# EAGLE board version3b (EAGLE 9.6.2)
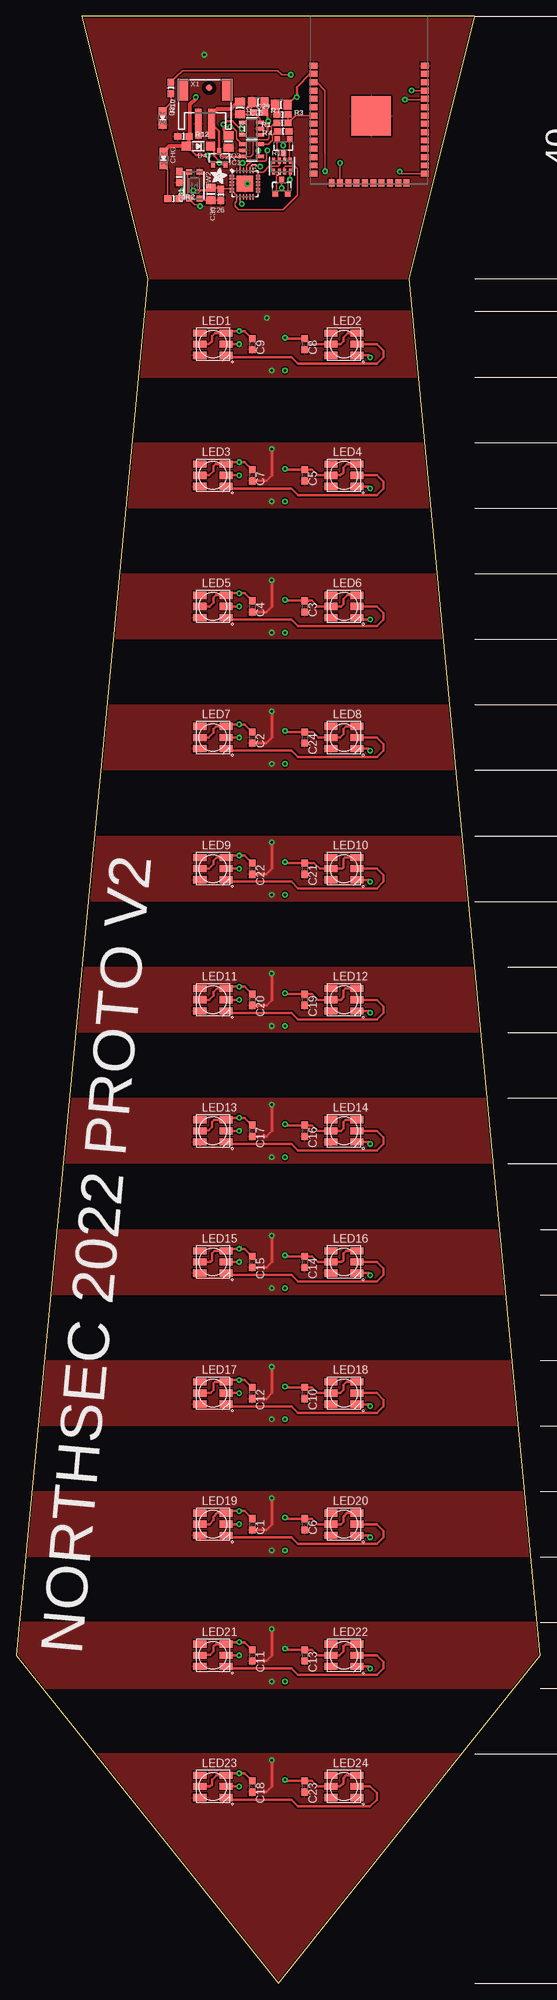
[diagram p0: board, top side]
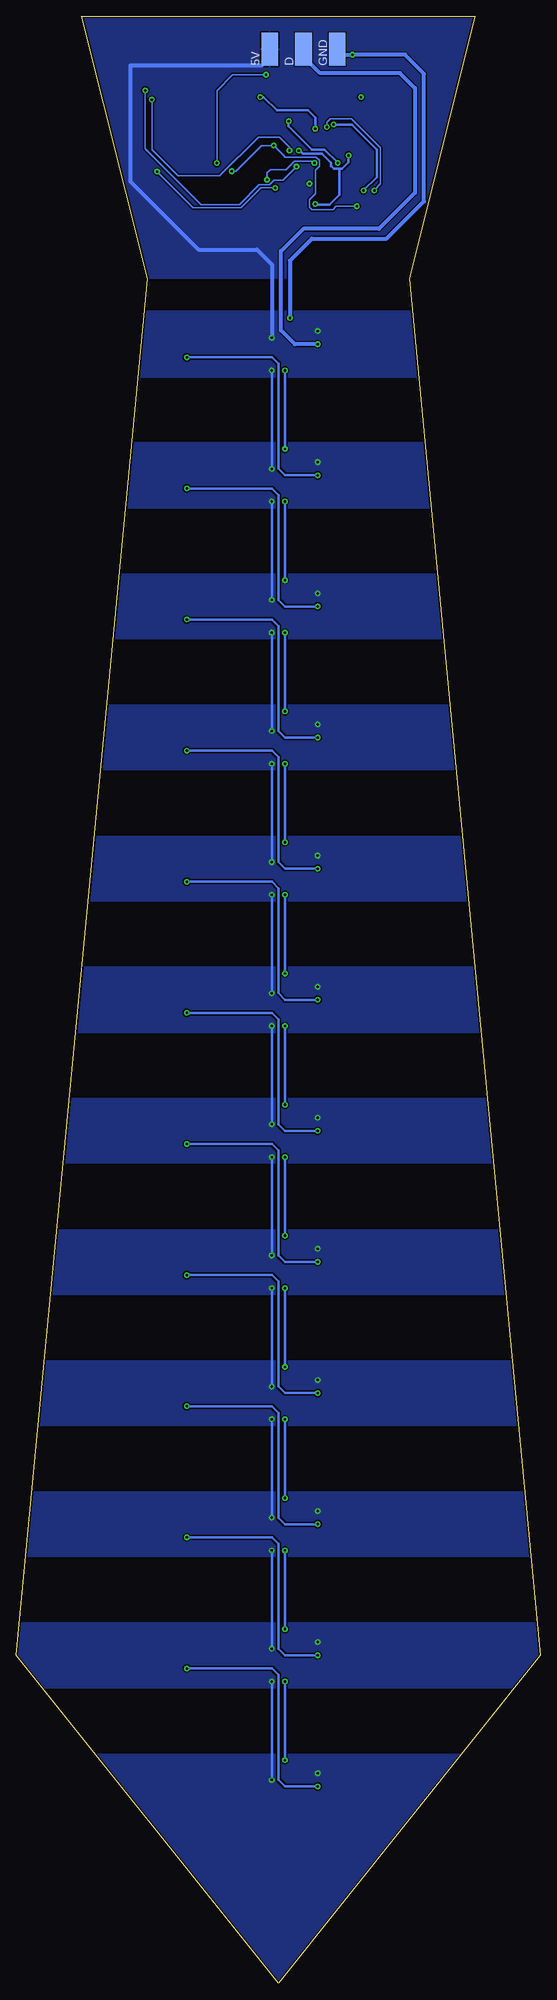
[diagram p1: board, bottom side, seen from below]

Size 80 x 300 mm. Coordinates in mm from the lower left corner, seen from the top.
Outline: 20,260 0,50 40,0 80,50 60,260 70,300 10,300 20,260
Copper layers (1*16): Top 0.035mm / dielectric 1.5mm / Bottom 0.035mm
Design rules "SparkFun *": minimum track width 8mil, minimum drill 0.35mm, track to track 8mil, track to pad 8mil, pad to pad 8mil, via to via 8mil, smd to smd 8mil, copper to edge 10mil, drill to drill 8mil, minimum pad ring 12mil, minimum via ring 10mil, stop-mask expansion 4mil, vias tented up to drill 25mil, thermal gap 10mil

## Footprints (pad centres in the part's own frame; a part is rotated, then mirrored left to right if it is on the bottom)
SMD2,54-5,08 = smd 2.54 x 5.08: 1 0,0
C0603 = smd 1.1 x 1: 1 -0.85,0; 2 0.85,0
0805-NO = smd 1.24 x 1.5: 1 -0.95,0; 2 0.95,0
0603-NO = smd 1.075 x 1: 1 -0.85,0; 2 0.85,0
CHIPLED_0805_NOOUTLINE = smd 1.2 x 1.2: A 0,-1.05; C 0,1.05
SOD-123 = smd 1.4 x 1.4: A 1.85,0; C -1.85,0
QFN24_4MM_SMSC = smd 0.8 x 0.28: 1 -2,1.25; 2 -2,0.75; 3 -2,0.25; 4 -2,-0.25; 5 -2,-0.75; 6 -2,-1.25; 13 2,-1.25; 14 2,-0.75; 15 2,-0.25; 16 2,0.25; 17 2,0.75; 18 2,1.25 | smd 0.28 x 0.8: 7 -1.25,-2; 8 -0.75,-2; 9 -0.25,-2; 10 0.25,-2; 11 0.75,-2; 12 1.25,-2; 19 1.25,2; 20 0.75,2; 21 0.25,2; 22 -0.25,2; 23 -0.75,2; 24 -1.25,2 | smd 2.5 x 2.5: THERM 0,0
WS28115050 = smd 2 x 1.1: DI 2,0; DO 2,-1.7; LEDVDD -2,0; NC -2,1.7; VDD 2,1.7; VSS -2,-1.7
SOT23-3 = smd 0.8 x 0.9: 1 -0.95,-1; 2 0.95,-1; 3 0,1.1
SOT23-R = smd 0.635 x 1.016: 1 -0.95,-1; 2 0.95,-1; 3 0,1
RESPACK_4X0603 = smd 0.45 x 0.9: 1 -1.3,-0.85; 2 -0.4,-0.85; 3 0.4,-0.85; 4 1.3,-0.85; 5 1.3,0.85; 6 0.4,0.85; 7 -0.4,0.85; 8 -1.3,0.85
BTN_KMR2_4.6X2.8 = smd 0.9 x 0.9: A 2.05,0.8; A' -2.05,0.8; B 2.05,-0.8; B' -2.05,-0.8
SOT23-5 = smd 0.55 x 1.2: 1 -0.95,-1.3; 2 0,-1.3; 3 0.95,-1.3; 4 0.95,1.3; 5 -0.95,1.3
FIDUCIAL_1MM = smd 1 x 1: 1 0,0
JSTPH2 = smd 1 x 4.6: 1 -1,-3.7; 2 1,-3.7 | smd 1.6 x 3.4: NC1 -3.4,1.5; NC2 3.4,1.5
WROOM32_SKINNY = smd 1.2 x 0.9: 1 -8.5,5; 2 -8.5,3.73; 3 -8.5,2.46; 4 -8.5,1.19; 5 -8.5,-0.08; 6 -8.5,-1.35; 7 -8.5,-2.62; 8 -8.5,-3.89; 9 -8.5,-5.16; 10 -8.5,-6.43; 11 -8.5,-7.7; 12 -8.5,-8.97; 13 -8.5,-10.24; 14 -8.5,-11.51; 25 8.5,-11.51; 26 8.5,-10.24; 27 8.5,-8.97; 28 8.5,-7.7; 29 8.5,-6.43; 30 8.5,-5.16; 31 8.5,-3.89; 32 8.5,-2.62; 33 8.5,-1.35; 34 8.5,-0.08; 35 8.5,1.19; 36 8.5,2.46; 37 8.5,3.73; 38 8.5,5 | smd 0.9 x 1.2: 15 -5.7,-12.9; 16 -4.43,-12.9; 17 -3.16,-12.9; 18 -1.89,-12.9; 19 -0.62,-12.9; 20 0.65,-12.9; 21 1.92,-12.9; 22 3.19,-12.9; 23 4.46,-12.9; 24 5.73,-12.9 | smd 6 x 6: P$1 0.34,-2.7

## Placement (x,y rotation side)
5V  [SMD2,54-5,08]  41.35,295 0 bottom
C1  [C0603]  36,70 270 top
C2  [C0603]  36,190 270 top
C3  [C0603]  44,210 270 top
C4  [C0603]  36,210 270 top
C5  [C0603]  44,230 270 top
C6  [C0603]  44,70 270 top
C7  [C0603]  36,230 270 top
C8  [C0603]  44,250 270 top
C9  [C0603]  36,250 270 top
C10  [C0603]  44,90 270 top
C11  [C0603]  36,50 270 top
C12  [C0603]  36,90 270 top
C13  [C0603]  44,50 270 top
C14  [C0603]  44,110 270 top
C15  [C0603]  36,110 270 top
C16  [C0603]  44,130 270 top
C17  [C0603]  36,130 270 top
C18  [C0603]  36,30 270 top
C19  [C0603]  44,150 270 top
C20  [C0603]  36,150 270 top
C21  [C0603]  44,170 270 top
C22  [C0603]  36,170 270 top
C23  [C0603]  44,30 270 top
C24  [C0603]  44,190 270 top
C25  10µF  [0805-NO]  36.92,286.88 180 top
C26  1uF  [0603-NO]  31.19,272.77 270 top
C27  10µF  [0805-NO]  32.37,280.89 270 top
C28  10µF  [0805-NO]  34.13,286.03 270 top
C29  10uF  [0805-NO]  40.42,286.54 180 top
C30  10uF  [0805-NO]  29.68,272.9 270 top
C31  1uF  [0603-NO]  24.86,275.49 270 top
CHG  ORANGE  [CHIPLED_0805_NOOUTLINE]  22.48,278.31 180 top
D  [SMD2,54-5,08]  36.19,295 0 bottom
D3  RED  [CHIPLED_0805_NOOUTLINE]  22.3,284.49 180 top
D4  MBR120  [SOD-123]  27.78,280.19 180 top
GND  [SMD2,54-5,08]  31.03,295 0 bottom
IC1  CP2104  [QFN24_4MM_SMSC]  34.89,274.48 0 top
LED1  WS28115050  [WS28115050]  30,250 0 top
LED2  WS28115050  [WS28115050]  50,250 0 top
LED3  WS28115050  [WS28115050]  30,230 0 top
LED4  WS28115050  [WS28115050]  50,230 0 top
LED5  WS28115050  [WS28115050]  30,210 0 top
LED6  WS28115050  [WS28115050]  50,210 0 top
LED7  WS28115050  [WS28115050]  30,190 0 top
LED8  WS28115050  [WS28115050]  50,190 0 top
LED9  WS28115050  [WS28115050]  30,170 0 top
LED10  WS28115050  [WS28115050]  50,170 0 top
LED11  WS28115050  [WS28115050]  30,150 0 top
LED12  WS28115050  [WS28115050]  50,150 0 top
LED13  WS28115050  [WS28115050]  30,130 0 top
LED14  WS28115050  [WS28115050]  50,130 0 top
LED15  WS28115050  [WS28115050]  30,110 0 top
LED16  WS28115050  [WS28115050]  50,110 0 top
LED17  WS28115050  [WS28115050]  30,90 0 top
LED18  WS28115050  [WS28115050]  50,90 0 top
LED19  WS28115050  [WS28115050]  30,70 0 top
LED20  WS28115050  [WS28115050]  50,70 0 top
LED21  WS28115050  [WS28115050]  30,50 0 top
LED22  WS28115050  [WS28115050]  50,50 0 top
LED23  WS28115050  [WS28115050]  30,30 0 top
LED24  WS28115050  [WS28115050]  50,30 0 top
Q1  mmbt2222  [SOT23-3]  40.76,280.26 180 top
Q2  mmbt2222  [SOT23-3]  40.48,273.97 0 top
Q3  DMG3415U  [SOT23-R]  30.95,278.41 0 top
R1  100K  [0603-NO]  40.61,283.75 180 top
R2  1K  [0603-NO]  23.97,272.19 0 top
R3  100K  [0603-NO]  40.61,285.02 0 top
R4  4.7K  [0603-NO]  40.73,282.48 180 top
R7  100K  [0603-NO]  37.05,285.34 0 top
R10  1K  [0603-NO]  23.59,289.08 270 top
R12  100K  [0603-NO]  25.49,281.72 0 top
R13  10K  [RESPACK_4X0603]  40.54,277.14 0 top
SW2  KMR2  [BTN_KMR2_4.6X2.8]  27.14,274.22 270 top
U2  AP2112-3.3  [SOT23-5]  35.91,282.86 90 top
U3  MCP73831T-2ACI/OT  [SOT23-5]  35.91,279.56 270 top
U$14  [ADAFRUIT_2.5MM]  29.73,274.45 0 top
U$34  FIDUCIAL_1MM  [FIDUCIAL_1MM]  29.43,289.08 270 top
X1  JSTPH  [JSTPH2]  28.8,287.3 0 top
X2  ESP32_WROOM32_SKINNY  [WROOM32_SKINNY]  53.82,287.5 0 top

## Library data of the parts
5V D GND = wirepad
C1-C24 = rcl
C25 C26 C28-C31 CHG D3 D4 IC1 LED1-LED24 Q3 R1-R4 R7 R10 R12 R13 SW2 U2 U3 U$14 X1 X2 = microbuilder
C27 = microbuilder; COMPANY: ADAFRUIT INDUSTRIES; DRAWN: KTOWN; REV: A
Q1 Q2 = SparkFun
U$34 = microbuilder; BOM: EXCLUDE

## Nets
3.3V: C26.1 C27.1 C29.1 C30.1 IC1.5 IC1.6 IC1.7 R13.3 U2.5 X2.2
A0_DAC2: X2.11
A1_DAC1: X2.10
A2_I34: X2.6
A3_I39: X2.5
A4_IO36: X2.4
A5_IO4: X2.26
A13_I35: R1.1 R3.2 X2.7
DTR: IC1.23 Q2.2 R13.4
EN: R7.1 U2.3
GND: C1.2 C2.2 C3.2 C4.2 C5.2 C6.2 C7.2 C8.2 C9.2 C10.2 C11.2 C12.2 C13.2 C14.2 C15.2 C16.2 C17.2 C18.2 C19.2 C20.2 C21.2 C22.2 C23.2 C24.2 C25.2 C26.2 C27.2 C28.2 C29.2 C30.2 C31.2 D3.C GND.1 IC1.2 IC1.THERM LED1.VSS LED2.VSS LED3.VSS LED4.VSS LED5.VSS LED6.VSS LED7.VSS LED8.VSS LED9.VSS LED10.VSS LED11.VSS LED12.VSS LED13.VSS LED14.VSS LED15.VSS LED16.VSS LED17.VSS LED18.VSS LED19.VSS LED20.VSS LED21.VSS LED22.VSS LED23.VSS LED24.VSS R3.1 R4.1 R12.1 SW2.A SW2.A' U2.2 U3.2 X1.1 X2.1 X2.15 X2.38 X2.P$1
GPIO0: Q2.3 X2.25
GPIO2: X2.24
IO12_A11: X2.14
IO13_A12: R10.1 X2.16
IO14_A6: X2.13
IO15_A8: X2.23
IO16: X2.27
IO17: X2.28
IO21: X2.33
IO27_A10: X2.12
IO32_A7: X2.8
IO33_A9: X2.9
MISO: X2.31
MOSI: X2.30
N$1: LED1.DO LED2.DI
N$2: LED2.DO LED3.DI
N$3: LED3.DO LED4.DI
N$4: LED4.DO LED5.DI
N$5: LED5.DO LED6.DI
N$6: LED6.DO LED7.DI
N$7: LED7.DO LED8.DI
N$8: LED8.DO LED9.DI
N$9: LED9.DO LED10.DI
N$10: LED10.DO LED11.DI
N$11: LED11.DO LED12.DI
N$12: LED12.DO LED13.DI
N$13: LED13.DO LED14.DI
N$14: LED14.DO LED15.DI
N$15: LED15.DO LED16.DI
N$16: LED16.DO LED17.DI
N$17: LED17.DO LED18.DI
N$18: LED18.DO LED19.DI
N$19: LED19.DO LED20.DI
N$20: LED20.DO LED21.DI
N$21: LED21.DO LED22.DI
N$22: LED22.DO LED23.DI
N$23: LED23.DO LED24.DI
N$24: CHG.C R2.1
N$25: R2.2 U3.1
N$26: D.1 LED1.DI
N$27: R4.2 U3.5
N$28: IC1.3
N$29: IC1.4
N$30: Q1.1 R13.5
N$31: Q2.1 R13.2
N$32: C25.1 D4.C Q3.2 R7.2 U2.1
N$33: D3.A R10.2
RESET: C31.1 Q1.3 R13.6 SW2.B SW2.B' X2.3
RTS: IC1.19 Q1.2 R13.7
RXD0: IC1.21 X2.34
SCK: X2.29
SCL: X2.36
SDA: X2.37
TXD0: IC1.20 X2.35
VBAT: C28.1 Q3.3 R1.2 U3.3 X1.2
VBUS: CHG.A D4.A IC1.8 Q3.1 R12.2 U3.4
VDD: 5V.1 C1.1 C2.1 C3.1 C4.1 C5.1 C6.1 C7.1 C8.1 C9.1 C10.1 C11.1 C12.1 C13.1 C14.1 C15.1 C16.1 C17.1 C18.1 C19.1 C20.1 C21.1 C22.1 C23.1 C24.1 LED1.LEDVDD LED1.VDD LED2.LEDVDD LED2.VDD LED3.LEDVDD LED3.VDD LED4.LEDVDD LED4.VDD LED5.LEDVDD LED5.VDD LED6.LEDVDD LED6.VDD LED7.LEDVDD LED7.VDD LED8.LEDVDD LED8.VDD LED9.LEDVDD LED9.VDD LED10.LEDVDD LED10.VDD LED11.LEDVDD LED11.VDD LED12.LEDVDD LED12.VDD LED13.LEDVDD LED13.VDD LED14.LEDVDD LED14.VDD LED15.LEDVDD LED15.VDD LED16.LEDVDD LED16.VDD LED17.LEDVDD LED17.VDD LED18.LEDVDD LED18.VDD LED19.LEDVDD LED19.VDD LED20.LEDVDD LED20.VDD LED21.LEDVDD LED21.VDD LED22.LEDVDD LED22.VDD LED23.LEDVDD LED23.VDD LED24.LEDVDD LED24.VDD

## Tracks (layer width: path | path; a pad name or v marks a point on that pad's centre or on a via)
3.3V  (via drill 0.35)
  Top 0.254: C26.1 30.8,273.62 | 31.26,273.73 IC1.5 IC1.6 33.09,273.23 33.64,272.68 IC1.7 33.64,271.83 33.37,271.56 33.37,271.05 33.93,270.49 40.72,270.49 42.92,272.69 42.92,276.76 42.54,277.14 41.11,277.14 40.86,276.89 40.86,276.38 R13.3 40.99,276.34
  Top 0.406: U2.5 34.38,282.13 v34.38,282.86 34.13,282.86 32.99,284 32.1,284 v31.59,283.49 31.59,282.73 32.37,281.95 C27.1 | 30.91,273.9 C26.1 | 31.26,273.73 31.26,273.69 C26.1 | v27.02,273.46 29.29,273.46 C30.1 30.96,273.85 C26.1 | 41.61,286.78 C29.1 42.51,287.68 v42.79,287.68 42.79,289.2 44.82,291.23 X2.2
  Bottom 0.406: v27.02,273.46 24.98,275.49 24.98,279.68 28.8,283.49 v31.59,283.49 | v34.38,282.86 34.38,284.51 35.53,285.65 40.23,285.65 42.25,287.68 v42.79,287.68
A5_IO4
  Top 0.254: X2.26 62.89,277.26
A13_I35
  Top 0.203: R1.1 42.59,284.88 X2.7
  Top 0.254: R1.1 R3.2 41.75,285.02
DTR  (via drill 0.35)
  Top 0.254: R13.4 41.75,276.2 v41.75,275.09 41.43,274.77 Q2.2 | IC1.23 34.14,277.28 v34.51,277.65
  Bottom 0.254: v34.51,277.65 34.76,277.91 37.56,277.91 38.83,276.64 41.24,276.64 41.75,276.13 v41.75,275.09
EN
  Top 0.254: 36.92,285.91 36.45,285.44 36.24,285.44 R7.1 37.21,284.39 U2.3
GND  (via drill 0.35)
  Top 0.254: IC1.2 34.89,275.23 34.89,274.73 35.02,274.73 v35.27,274.48 | C26.2 28.19,271.93 SW2.A | C28.2 35.21,285.08 | 35.25,285.14 35.25,286.19 35.94,286.88 C25.2 | C31.2 24.86,274.48 | C29.2 39.76,286.25 R3.1
  Top 0.406: C2.2 38.15,189.15 39,190 v39,194 | C4.2 38.15,209.15 39,210 v39,214 | C7.2 38.15,229.15 39,230 v39,234 | C22.2 38.15,169.15 39,170 v39,174 | C17.2 38.15,129.15 39,130 v39,134 | C15.2 38.15,109.15 39,110 v39,114 | C12.2 38.15,89.15 39,90 v39,94 | C1.2 38.15,69.15 39,70 v39,74 | C11.2 38.15,49.15 39,50 v39,54 | C18.2 38.15,29.15 39,30 v39,34 | C20.2 38.15,149.15 39,150 v39,154
  Bottom 0.406: v39,234 v39,246 | v39,214 v39,226 | v39,194 v39,206 | v39,174 v39,186 | v39,134 v39,146 | v39,114 v39,126 | v39,94 v39,106 | v39,74 v39,86 | v39,54 v39,66 | v39,34 v39,46 | v39,154 v39,166
  Bottom 0.61: v38.24,254 38.24,262.77 34.92,266.09 23.49,266.09 17.77,271.81 17.77,291.24 20.7,294.16 v28.7,294.16 30.19,294.16 GND.1
  pour Top (isolate 0.1): 10,300 10,260 70,260 70,300
  pour Top (isolate 0.1): 10,255 10,245 70,245 70,255
  pour Top (isolate 0.1): 10,235 70,235 70,225 10,225
  pour Top (isolate 0.1): 10,215 70,215 70,205 10,205
  pour Top (isolate 0.1): 10,195 70,195 70,185 10,185
  pour Top (isolate 0.1): 10,175 70,175 70,165 10,165
  pour Top (isolate 0.1): 5,155 75,155 75,145 5,145
  pour Top (isolate 0.1): 0,115 80,115 80,105 0,105
  pour Top (isolate 0.1): 5,135 75,135 75,125 5,125
  pour Top (isolate 0.1): 0,95 80,95 80,85 0,85
  pour Top (isolate 0.1): 0,75 80,75 80,65 0,65
  pour Top (isolate 0.1): 0,45 80,45 80,55 0,55
  pour Top (isolate 0.1): 10,35 10,0 70,0 70,35
GPIO0  (via drill 0.35)
  Top 0.254: v58.52,276.32 58.84,276 60.55,276 60.57,275.99 X2.25 | Q2.3 v40.48,273.84
  Bottom 0.254: v40.48,273.84 42.66,273.84 45.72,270.79 52.99,270.79 v58.52,276.32
IO13_A12  (via drill 0.35)
  Top 0.254: 49.39,274.78 X2.16 v49.39,277.64 v49.4,277.65 | R10.1 23.59,289.96 24.46,290.83 24.48,290.83 25.39,291.75 39.87,291.75 40.51,291.11 v41.91,291.11
  Bottom 0.254: v41.91,291.11 46.98,291.11 49.4,288.7 v49.4,277.65
IO15_A8
  Top 0.254: 58.4,274.49 X2.23
MOSI
  Top 0.254: X2.30 62.89,282.34
N$1
  Top 0.406: LED1.DO 32.3,248 42,248 43,247 55,247 56,248 56,249 55,250 LED2.DI
N$2  (via drill 0.35)
  Top 0.406: LED2.DO 53.7,248.3 v54,248 | v34,230 LED3.DI
  Bottom 0.406: v54,248 41,248 40,247 40,231 39,230 v34,230
N$3
  Top 0.406: LED3.DO 32.3,228 42,228 43,227 55,227 56,228 56,229 55,230 LED4.DI
N$4  (via drill 0.35)
  Top 0.406: LED4.DO 53.7,228.3 v54,228 | LED5.DI v34,210
  Bottom 0.406: v54,228 41,228 40,227 40,211 39,210 v34,210
N$5
  Top 0.406: LED5.DO 32.3,208 42,208 43,207 55,207 56,208 56,209 55,210 LED6.DI
N$6  (via drill 0.35)
  Top 0.406: LED6.DO 52.3,208 v54,208 | v34,190 LED7.DI
  Bottom 0.406: v54,208 41,208 40,207 40,191 39,190 v34,190
N$7
  Top 0.406: LED7.DO 32.7,188.3 33,188 42,188 43,187 55,187 56,188 56,189 55,190 LED8.DI
N$8  (via drill 0.35)
  Top 0.406: LED8.DO 53.7,188.3 v54,188 | v34,170 LED9.DI
  Bottom 0.406: v54,188 41,188 40,187 40,171 39,170 v34,170
N$9
  Top 0.406: LED9.DO 32.7,168.3 33,168 42,168 43,167 55,167 56,168 56,169 55,170 LED10.DI
N$10  (via drill 0.35)
  Top 0.406: LED10.DO 53.7,168.3 v54,168 | v34,150 LED11.DI
  Bottom 0.406: v54,168 41,168 40,167 40,151 39,150 v34,150
N$11
  Top 0.406: LED11.DO 32.7,148.3 33,148 42,148 43,147 55,147 56,148 56,149 55,150 LED12.DI
N$12  (via drill 0.35)
  Top 0.406: LED12.DO 53.7,148.3 v54,148 | v34,130 LED13.DI
  Bottom 0.406: v54,148 41,148 40,147 40,131 39,130 v34,130
N$13
  Top 0.406: LED13.DO 32.7,128.3 33,128 42,128 43,127 55,127 56,128 56,129 55,130 LED14.DI
N$14  (via drill 0.35)
  Top 0.406: LED14.DO 53.7,128.3 v54,128 | v34,110 LED15.DI
  Bottom 0.406: v54,128 41,128 40,127 40,111 39,110 v34,110
N$15
  Top 0.406: LED15.DO 32.7,108.3 33,108 42,108 43,107 55,107 56,108 56,109 55,110 LED16.DI
N$16  (via drill 0.35)
  Top 0.406: LED16.DO 53.7,108.3 v54,108 | v34,90 LED17.DI
  Bottom 0.406: v54,108 41,108 40,107 40,91 39,90 v34,90
N$17
  Top 0.406: LED17.DO 32.7,88.3 33,88 42,88 43,87 55,87 56,88 56,89 55,90 LED18.DI
N$18  (via drill 0.35)
  Top 0.406: LED18.DO 53.7,88.3 v54,88 | v34,70 LED19.DI
  Bottom 0.406: v54,88 41,88 40,87 40,71 39,70 v34,70
N$19
  Top 0.406: LED19.DO 32.7,68.3 33,68 42,68 43,67 55,67 56,68 56,69 55,70 LED20.DI
N$20  (via drill 0.35)
  Top 0.406: LED20.DO 53.7,68.3 v54,68 | v34,50 LED21.DI
  Bottom 0.406: v54,68 41,68 40,67 40,51 39,50 v34,50
N$21
  Top 0.406: LED21.DO 32.7,48.3 33,48 42,48 43,47 55,47 56,48 56,49 55,50 LED22.DI
N$22  (via drill 0.35)
  Top 0.406: LED22.DO 53.7,48.3 v54,48 | v34,30 LED23.DI
  Bottom 0.406: v54,48 41,48 40,47 40,31 39,30 v34,30
N$23
  Top 0.406: LED23.DO 32.7,28.3 33,28 42,28 43,27 54,27 55,28 55,29 54,30 LED24.DI
N$24
  Top 0.254: CHG.C 22.49,277.26 23.12,276.64 R2.1
N$25  (via drill 0.35)
  Top 0.254: v32.61,283.11 33.01,283.11 33.62,282.5 33.62,281.33 34.45,280.51 U3.1 | R2.2 24.82,272.91 v25.37,273.46
  Bottom 0.254: v32.61,283.11 32.61,283.88 32.1,284.38 28.85,284.38 24.4,279.94 24.4,274.48 25.37,273.51 v25.37,273.46
N$26  (via drill 0.35)
  Top 0.406: v34,250 LED1.DI
  Bottom 0.61: 36.19,294.87 D.1 36.32,294.87 36.32,294.03 33.65,291.36 21.46,291.36 19.17,289.08 19.17,273.08 24.63,267.62 36.19,267.62 39.62,264.19 39.62,252.12 37.5,250 v34,250
N$27
  Top 0.254: U3.5 38.51,280.51 39.08,281.08 39.08,281.84 39.72,282.48 R4.2
N$30
  Top 0.254: Q1.1 41.71,278.13 R13.5
N$31
  Top 0.254: 39.24,273.26 Q2.1 39.46,273.04 39.46,273.08 39.72,273.33 39.72,275.62 40.14,276.05 R13.2
N$32  (via drill 0.35)
  Top 0.406: 38.32,284 38.32,282.55 37.67,281.91 U2.1 | 38.32,284 38.32,285.14 38.07,285.4 R7.2 37.87,285.43 C25.1 | v30.95,277.65 31.19,277.41 Q3.2 | v38.45,284 38.32,284 | 29.63,279.87 D4.C 29.63,279.97 30.14,279.45 30.14,278.74 30.95,277.93 v30.95,277.65 | 30.95,277.96 v30.95,277.65
  Bottom 0.406: v30.95,277.65 32.99,279.68 34.89,279.68 38.45,283.24 v38.45,284
N$33
  Top 0.254: D3.A 22.76,285.97 23.59,286.8 R10.2
RESET  (via drill 0.35)
  Top 0.203: 47.11,279.17 v47.11,276.38
  Top 0.254: v28.03,271.05 27.91,271.18 27.91,271.3 27.21,271.3 SW2.B 26.13,272.39 26.13,276.13 26.2,276.13 SW2.B' 26.27,276.34 C31.1 | v40.71,280.29 40.76,280.24 Q1.3 40.94,278.97 R13.6 | X2.3 45.85,289.96 47.11,288.7 47.11,279.17
  Bottom 0.203: 46.48,276.38 v47.11,276.38
  Bottom 0.254: v28.03,271.05 31.21,271.05 31.72,270.54 34.89,270.54 35.27,270.92 35.27,272.06 34.38,272.95 34.38,276.51 33.75,277.14 33.75,278.03 34.26,278.54 39.08,278.54 39.08,278.67 v40.71,280.29 42.56,280.29 46.48,276.38
RTS
  Top 0.254: IC1.19 36.52,276.48 36.74,276.25 37.69,276.25 38.57,277.14 39.97,277.14 40.14,277.32 R13.7 39.97,278.17 39.97,279.68 39.81,279.85 Q1.2
RXD0  (via drill 0.35)
  Top 0.254: IC1.21 35.14,277.19 35.86,277.91 37.94,277.91 38.19,278.16 38.19,279.43 v38.32,279.56 | X2.34 62.21,287.3 v59.3,287.3
  Bottom 0.203: 48.95,275.68 55.3,275.68
  Bottom 0.254: v38.32,279.56 38.32,280.06 39.84,281.58 43.05,281.58 48.95,275.68 | 55.3,275.68 59.3,279.68 v59.3,287.3
SCK
  Top 0.254: X2.29 62.5,280.89
TXD0  (via drill 0.35)
  Top 0.254: IC1.20 35.64,277.03 35.88,277.27 37.05,277.27 v37.24,277.08 | X2.35 v60.32,288.7
  Bottom 0.254: v37.24,277.08 39.34,274.99 40.68,274.99 41.37,274.3 42.97,274.3 45.97,271.3 51.81,271.3 60.32,279.81 v60.32,288.7
VBAT
  Top 0.254: 29.68,284.26 29.94,284 | U3.3 35.72,278.61 35.72,278.63 36.09,279 36.09,281.21 38.32,281.21 38.57,281.46 38.57,282.03 38.9,282.36 38.9,283.21 39.44,283.75 R1.2 39.46,283.75
  Top 0.406: X1.2 29.94,283.75 | 29.94,283.75 29.94,284 | 29.68,284.89 29.68,284.26 | 29.94,283.75 29.94,283.49 30.95,282.48 Q3.3 30.95,279.16 31.51,278.61 U3.3 | 33.93,286.8 34.12,286.98
  Top 0.61: 29.68,284.89 30.7,285.91 32.79,285.91 33.86,286.98 34.12,286.98 | 34.12,286.98 C28.1 | 34.12,286.98 34.51,287.38
VBUS  (via drill 0.35)
  Top 0.254: D4.A 26.34,280.61 | IC1.8 34.14,271.62 v34.38,271.38
  Top 0.406: Q3.1 30,277.46 29.3,278.16 v29.3,278.8 27.4,278.8 26,280.19 D4.A 25.37,280.19 | U3.4 36.92,278.89 v36.92,279.53
  Top 0.61: 26.34,280.61 R12.2 26.51,281.88 26.51,286.57 27.4,287.46 v27.4,287.69 | D4.A 23.31,280.19 CHG.A
  Bottom 0.406: v36.92,279.53 36.77,279.53 36.29,279.05 33.37,279.05 31.97,277.65 31.97,277.14 31.95,277.14 31.56,276.76 30.7,276.76 | 30.7,276.76 30.32,276.76 29.3,277.78 v29.3,278.8 | 30.7,276.76 30.7,272.83 32.22,271.3 34.31,271.3 v34.38,271.38
VDD  (via drill 0.35)
  Top 0.406: C9.1 34.85,252 v34,252 32.3,252 LED1.VDD 30.31,251.7 29.84,251.23 29.84,250.47 29.37,250 LED1.LEDVDD | v41,251 41.15,250.85 C8.1 44.08,250.93 45,250 LED2.LEDVDD 49.44,250 49.91,250.47 49.91,250.98 50.63,251.7 LED2.VDD | v41,231 41.15,230.85 C5.1 45.15,230.85 46,230 LED4.LEDVDD 49.5,230 49.91,230.4 49.91,231.17 50.44,231.7 LED4.VDD | C7.1 34.85,232 v34,232 32.3,232 LED3.VDD 30.37,231.7 30.09,231.42 30.09,230.66 29.44,230 LED3.LEDVDD | v41,211 41.15,210.85 C3.1 45.15,210.85 46,210 LED6.LEDVDD 49.57,210 49.91,210.34 49.91,211.1 50.51,211.7 LED6.VDD | C4.1 34.85,212 v34,212 32.3,212 LED5.VDD 30.44,211.7 30.09,211.35 30.09,210.59 29.5,210 LED5.LEDVDD | v41,191 41.15,190.85 C24.1 45.26,190.85 46.11,190 LED8.LEDVDD 49.38,190 49.91,190.53 49.91,191.29 50.32,191.7 LED8.VDD | v41,171 41.15,170.85 C21.1 45.45,170.85 46.3,170 LED10.LEDVDD 49.7,170 49.91,170.21 49.91,171.48 50.13,171.7 LED10.VDD | v41,151 41.15,150.85 C19.1 45.15,150.85 46,150 LED12.LEDVDD 49.51,150 49.91,150.39 49.91,151.41 50.2,151.7 LED12.VDD | v41,131 41.15,130.85 C16.1 45.15,130.85 46,130 LED14.LEDVDD 49.58,130 49.91,130.33 49.91,131.34 50.26,131.7 LED14.VDD | v41,111 41.15,110.85 C14.1 45.15,110.85 46,110 LED16.LEDVDD 49.65,110.01 49.91,110.26 49.91,111.28 50.33,111.7 LED16.VDD | v41,91 41.15,90.85 C10.1 45.15,90.85 46,90 LED18.LEDVDD 49.46,90 49.91,90.45 49.91,91.21 50.39,91.7 LED18.VDD | v41,71 41.15,70.85 C6.1 45.15,70.85 46,70 LED20.LEDVDD 49.52,70 49.91,70.38 49.91,71.15 50.46,71.7 LED20.VDD | v41,51 41.15,50.85 C13.1 45.15,50.85 46,50 LED22.LEDVDD 49.33,50 49.91,50.57 49.91,51.33 50.27,51.7 LED22.VDD
  Top 0.406: v41,31 41.15,30.85 C23.1 45.15,30.85 46,30 LED24.LEDVDD | C17.1 34.85,132 v34,132 32.3,132 LED13.VDD 30.2,131.7 29.84,131.34 29.84,130.58 29.33,130.07 28.07,130.07 LED13.LEDVDD | C20.1 34.85,152 v34,152 32.3,152 LED11.VDD 30.64,151.7 30.09,151.16 30.09,150.65 29.45,150 LED11.LEDVDD | C18.1 34.85,32 v34,32 32.3,32 LED23.VDD 30.53,31.7 29.84,31.01 29.84,30.25 29.59,30 29.08,30 LED23.LEDVDD | C11.1 34.85,52 v34,52 32.3,52 LED21.VDD 30.46,51.7 30.09,51.33 30.09,50.57 29.59,50.06 28.06,50.06 LED21.LEDVDD | C1.1 34.85,72 v34,72 32.3,72 LED19.VDD 30.65,71.7 30.09,71.15 30.09,70.64 29.46,70 LED19.LEDVDD | C12.1 34.85,92 v34,92 32.3,92 LED17.VDD 30.33,91.7 30.09,91.47 30.09,90.45 29.64,90 LED17.LEDVDD | C15.1 34.85,112 v34,112 32.3,112 LED15.VDD 30.26,111.7 29.84,111.28 29.84,110.26 29.59,110.01 LED15.LEDVDD | C2.1 34.85,192 v34,192 32.3,192 LED7.VDD 30.51,191.7 30.09,191.29 30.09,190.78 29.31,190 LED7.LEDVDD | C22.1 34.85,172 v34,172 32.3,172 LED9.VDD 30.57,171.7 30.09,171.22 30.09,170.71 29.38,170 LED9.LEDVDD | 48.12,30.12 LED24.LEDVDD | 51.23,31.7 LED24.VDD 50.34,31.7 49.91,31.27 49.91,30.51 49.4,30 49.14,30 LED24.LEDVDD
  Bottom 0.406: v41,231 v41,246 | v41,211 v41,226 | v41,191 v41,206 | v41,171 v41,186 | v41,151 v41,166 | v41,131 v41,146 | v41,111 v41,126 | v41,91 v41,106 | v41,71 v41,86 | v41,51 v41,66 | v41,31 v41,46
  Bottom 0.61: 5V.1 41.35,293.73 42.57,292.51 62.61,292.51 62.61,274.85 52.19,264.44 43.3,264.44 41,262.14 v41,251
  pour Bottom (isolate 0.1): 10,235 70,235 70,225 10,225
  pour Bottom (isolate 0.1): 10,255 70,255 70,245 10,245
  pour Bottom (isolate 0.1): 10,260 70,260 70,300 10,300
  pour Bottom (isolate 0.1): 10,215 10,205 70,205 70,215
  pour Bottom (isolate 0.1): 10,195 10,185 70,185 70,195
  pour Bottom (isolate 0.1): 10,175 10,165 70,165 70,175
  pour Bottom (isolate 0.1): 5,155 75,155 75,145 5,145
  pour Bottom (isolate 0.1): 5,135 5,125 75,125 75,135
  pour Bottom (isolate 0.1): 0,115 0,105 80,105 80,115
  pour Bottom (isolate 0.1): 0,95 0,85 80,85 80,95
  pour Bottom (isolate 0.1): 0,75 0,65 80,65 80,75
  pour Bottom (isolate 0.1): 0,55 0,45 80,45 80,55
  pour Bottom (isolate 0.1): 10,35 10,0 70,0 70,35
(copper drawn outside any net)
  shapes: Top area x3

## Text on the board
tPlace: Note: / Flexible PCB 0.2mm FPC / Stiffener 0.8mm FR4 / (Stiffener matches copper layer) | Stiffener BOT | Stiffener BOT | Stiffener BOT | Stiffener BOT | Stiffener BOT | Stiffener BOT | Stiffener BOT | ACTION ITEM / - solder neopixel on prototype / - investigate battery AA (can through-hole fit?) / - go to office, glue AA holder to test (send photo) / - could we have AAA lithium (10440) / - deadline: 10 Janvier for V3 proto sent to PCBWAY | Stiffener BOT | Stiffener BOT | Stiffener BOT | Stiffener BOT | NORTHSEC 2022 PROTO V2 | Stiffener BOT | Stiffener BOT